# EAGLE board GPSClock (EAGLE 6.5.0)
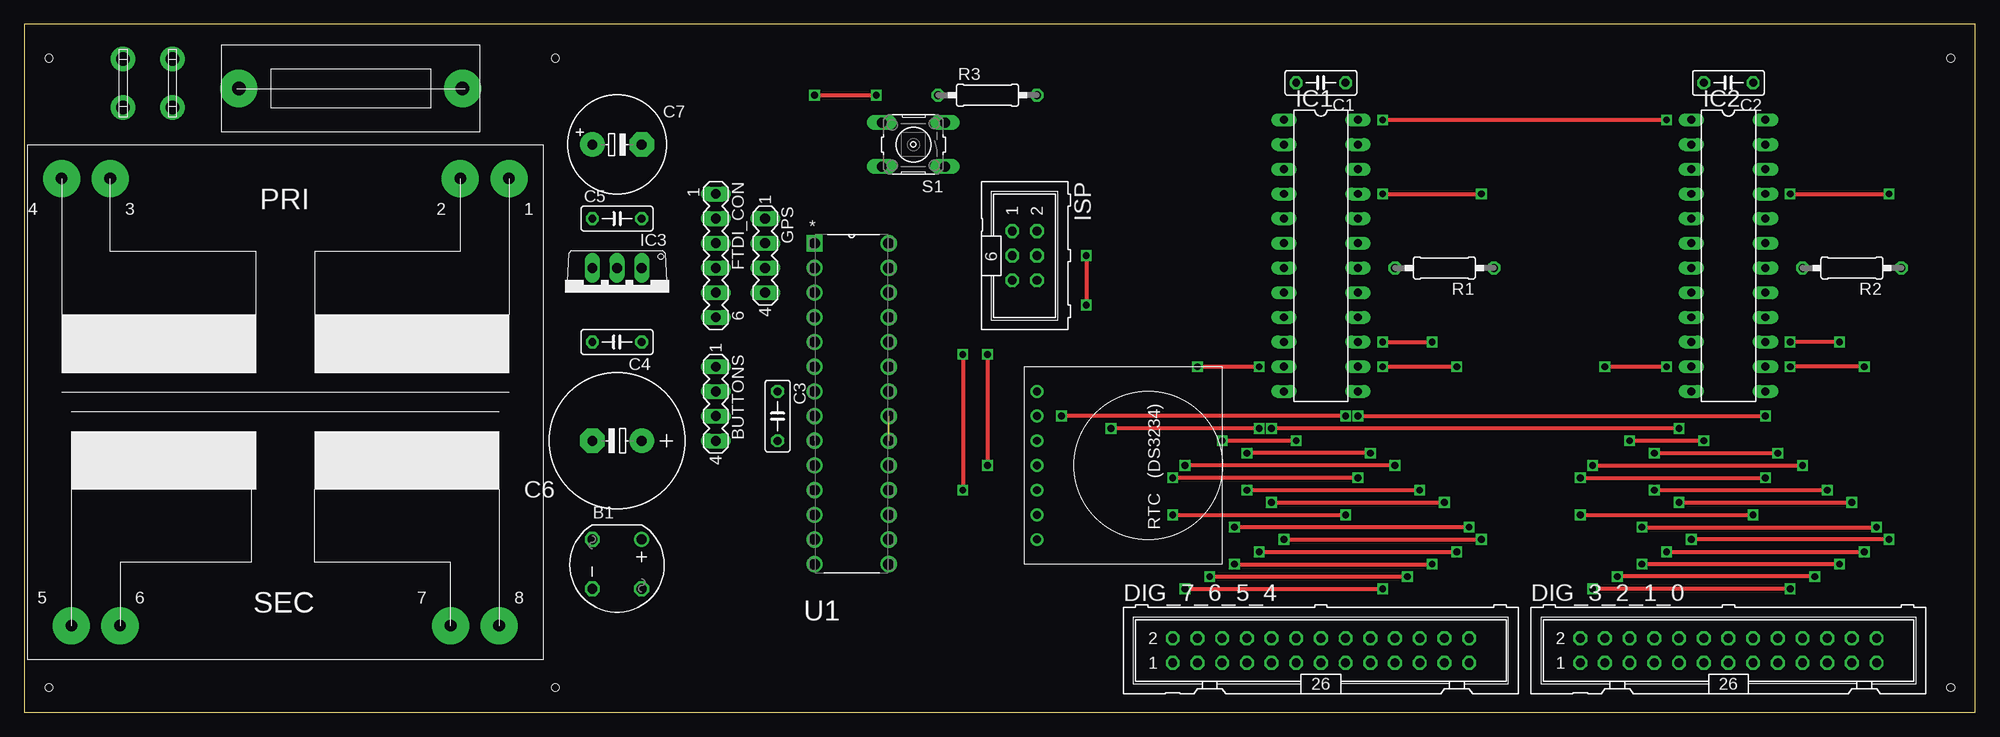
[diagram p0: board, top side]
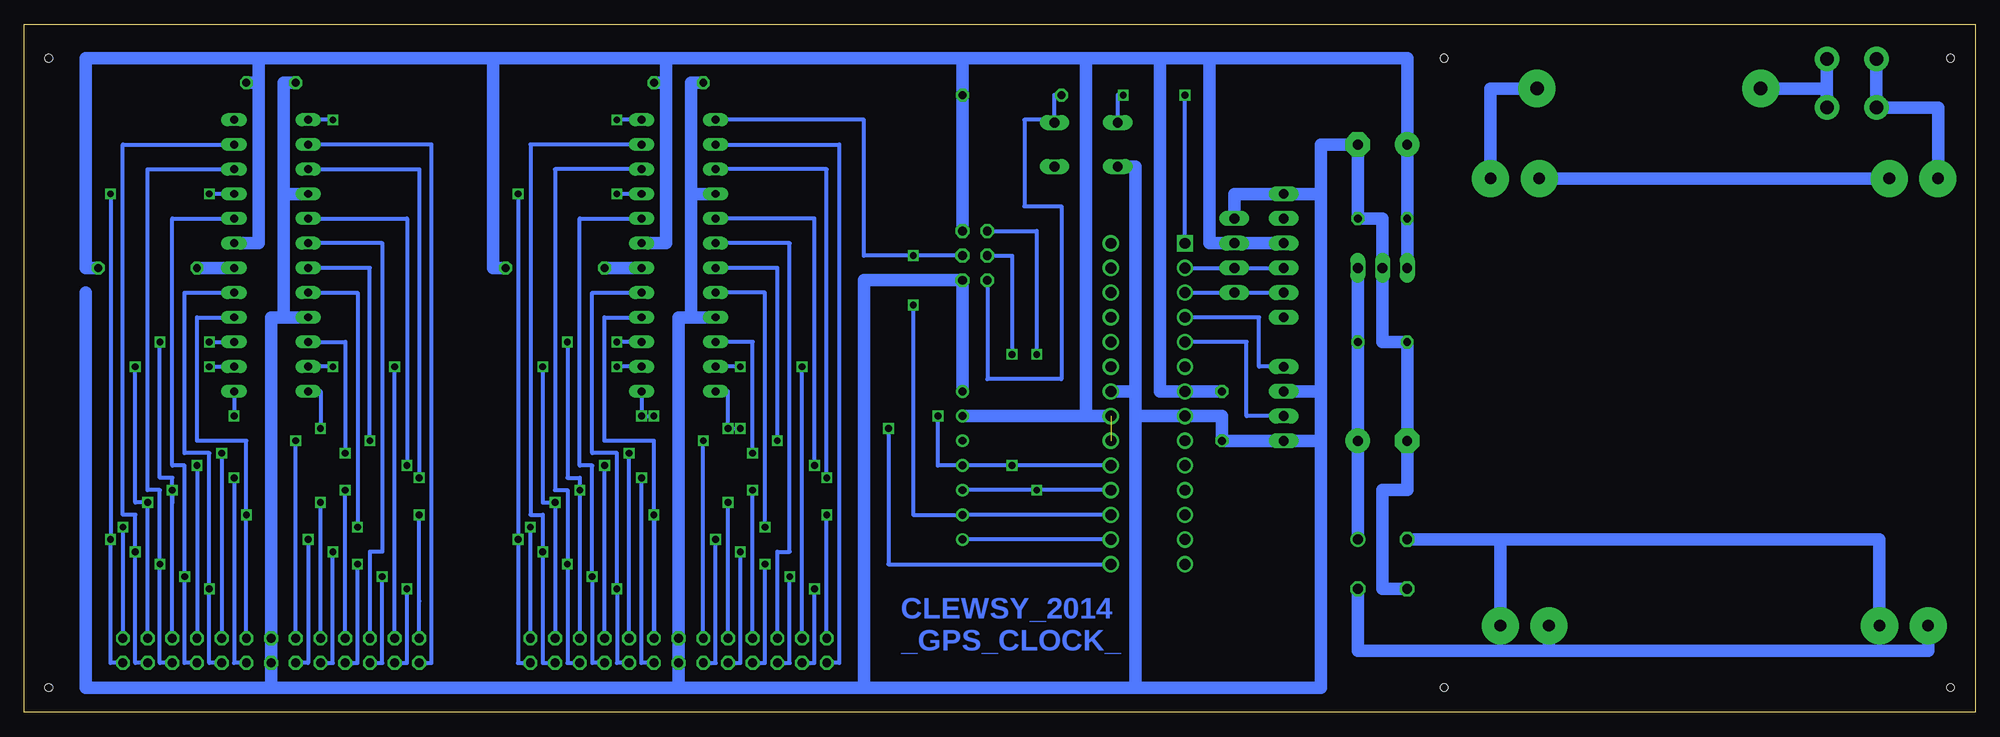
[diagram p1: board, bottom side, seen from below]

Size 200.64 x 70.79 mm. Coordinates in mm from the lower left corner, seen from the top.
Outline: 0,0 200.64,0 200.64,70.79 0,70.79 0,0
Copper layers (1*16): Top 0.035mm / dielectric 1.5mm / Bottom 0.035mm
Design rules "default": minimum track width 10mil, minimum drill 24mil, track to track 8mil, track to pad 8mil, pad to pad 8mil, via to via 8mil, smd to smd 8mil, copper to edge 40mil, drill to drill 8mil, minimum pad ring 10mil, minimum via ring 8mil, stop-mask expansion 4mil, vias tented up to drill 0mil, thermal gap 10mil
Holes 0.8 mm at 198.12,2.54 54.61,2.54 54.61,67.31 198.12,67.31 2.54,67.31 2.54,2.54

## Footprints (pad centres in the part's own frame; a part is rotated, then mirrored left to right if it is on the bottom)
RB1A = drill 1.016: + -2.54,2.54 | drill 1.016 octagon: - 2.54,-2.54; AC1 2.54,2.54; AC2 -2.54,-2.54
MA04-1 = drill 1.016 long: 1 -3.81,0; 2 -1.27,0; 3 1.27,0; 4 3.81,0
C050-025X075 = drill 0.813 octagon: 1 -2.54,0; 2 2.54,0
E5-13 = drill 1.016 pad 2.54: + -2.54,0 | drill 1.016 pad 2.54 octagon: - 2.54,0
E5-10,5 = drill 1.016 pad 2.54: + -2.54,0 | drill 1.016 pad 2.54 octagon: - 2.54,0
ML26 = drill 0.914 octagon: 1 -15.24,-1.27; 2 -15.24,1.27; 3 -12.7,-1.27; 4 -12.7,1.27; 5 -10.16,-1.27; 6 -10.16,1.27; 7 -7.62,-1.27; 8 -7.62,1.27; 9 -5.08,-1.27; 10 -5.08,1.27; 11 -2.54,-1.27; 12 -2.54,1.27; 13 0,-1.27; 14 0,1.27; 15 2.54,-1.27; 16 2.54,1.27; 17 5.08,-1.27; 18 5.08,1.27; 19 7.62,-1.27; 20 7.62,1.27; 21 10.16,-1.27; 22 10.16,1.27; 23 12.7,-1.27; 24 12.7,1.27; 25 15.24,-1.27; 26 15.24,1.27
MA06-1 = drill 1.016 long: 1 -6.35,0; 2 -3.81,0; 3 -1.27,0; 4 1.27,0; 5 3.81,0; 6 6.35,0
DIL24-3 = drill 0.813 long: 1 -13.97,-3.81; 2 -11.43,-3.81; 3 -8.89,-3.81; 4 -6.35,-3.81; 5 -3.81,-3.81; 6 -1.27,-3.81; 7 1.27,-3.81; 8 3.81,-3.81; 9 6.35,-3.81; 10 8.89,-3.81; 11 11.43,-3.81; 12 13.97,-3.81; 13 13.97,3.81; 14 11.43,3.81; 15 8.89,3.81; 16 6.35,3.81; 17 3.81,3.81; 18 1.27,3.81; 19 -1.27,3.81; 20 -3.81,3.81; 21 -6.35,3.81; 22 -8.89,3.81; 23 -11.43,3.81; 24 -13.97,3.81
TO220V = drill 1.016 long: 1 -2.54,-2.54; 2 0,-2.54; 3 2.54,-2.54
ML6 = drill 0.914 octagon: 1 -2.54,-1.27; 2 -2.54,1.27; 3 0,-1.27; 4 0,1.27; 5 2.54,-1.27; 6 2.54,1.27
0207/10 = drill 0.813 octagon: 1 -5.08,0; 2 5.08,0
B3F-10XX = drill 1.016 long: 1 -3.251,2.261; 2 3.251,2.261; 3 -3.251,-2.261; 4 3.251,-2.261
DIP254P762X457-28 = drill 1.118 square: 1 -7.62,33.02 | drill 1.118: 2 -7.62,30.48; 3 -7.62,27.94; 4 -7.62,25.4; 5 -7.62,22.86; 6 -7.62,20.32; 7 -7.62,17.78; 8 -7.62,15.24; 9 -7.62,12.7; 10 -7.62,10.16; 11 -7.62,7.62; 12 -7.62,5.08; 13 -7.62,2.54; 14 -7.62,0; 15 0,0; 16 0,2.54; 17 0,5.08; 18 0,7.62; 19 0,10.16; 20 0,12.7; 21 0,15.24; 22 0,17.78; 23 0,20.32; 24 0,22.86; 25 0,25.4; 26 0,27.94; 27 0,30.48; 28 0,33.02
TRAFO_M4312 = drill 1.2 pad 3.81: P1 3.5,3.5; P2 8.5,3.5; P3 44.5,3.5; P4 49.5,3.5; P5 48.5,49.5; P6 43.5,49.5; P7 9.5,49.5; P8 4.5,49.5
SPADE_PCB = drill 1.4 pad 2.54: P$1 0,0; P$2 5,0
FUSE_HOLDER = drill 1.4 pad 3.81: P$1 1.75,4.5; P$2 24.75,4.5
RTC = drill 0.8: P1 2.54,1.27; P2 5.08,1.27; P3 7.62,1.27; P4 10.16,1.27; P5 12.7,1.27; P6 15.24,1.27; P7 17.78,1.27

## Placement (x,y rotation side)
B1  [RB1A]  60.96,15.24 270 top
BUTTONS  [MA04-1]  71.12,31.75 270 top
C1  [C050-025X075]  133.35,64.77 180 top
C2  [C050-025X075]  175.26,64.77 180 top
C3  [C050-025X075]  77.47,30.48 270 top
C4  [C050-025X075]  60.96,38.1 180 top
C5  [C050-025X075]  60.96,50.8 0 top
C6  [E5-13]  60.96,27.94 180 top
C7  [E5-10,5]  60.96,58.42 0 top
DIG_3_2_1_0  [ML26]  175.26,6.35 0 top
DIG_7_6_5_4  [ML26]  133.35,6.35 0 top
FTDI_CON  [MA06-1]  71.12,46.99 270 top
GPS  [MA04-1]  76.2,46.99 270 top
IC1  MAX7219CNG  [DIL24-3]  133.35,46.99 270 top
IC2  MAX7219CNG  [DIL24-3]  175.26,46.99 270 top
IC3  7805TV  [TO220V]  60.96,43.18 180 top
ISP  [ML6]  102.87,46.99 270 top
R1  [0207/10]  146.05,45.72 180 top
R2  [0207/10]  187.96,45.72 180 top
R3  [0207/10]  99.06,63.5 0 top
S1  [B3F-10XX]  91.44,58.42 180 top
U1  ATMEGA328P-PU  [DIP254P762X457-28]  88.9,15.24 0 top
U$1  TRAFO_M4312  [TRAFO_M4312]  53.34,58.42 180 top
U$2  SPADE_PCB  [SPADE_PCB]  10.16,62.23 90 top
U$3  SPADE_PCB  [SPADE_PCB]  15.24,62.23 90 top
U$4  FUSE_HOLDER  [FUSE_HOLDER]  20.32,59.69 0 top
U$5  RTC  [RTC]  102.87,35.56 270 top

## Library data of the parts
B1 = rectifier
BUTTONS FTDI_CON GPS = con-lstb; OC_FARNELL: unknown; OC_NEWARK: unknown
C1-C7 R1-R3 = rcl
DIG_3_2_1_0 DIG_7_6_5_4 ISP = con-harting-ml; OC_FARNELL: unknown; OC_NEWARK: unknown
IC1 IC2 = maxim; MF: MAXIM; MPN: MAX7219CNG; OC_FARNELL: 1523914; OC_NEWARK: 34C4018
IC3 = linear
S1 = switch-omron; MPN: B3F-1000; OC_FARNELL: 176432; OC_NEWARK: 36M3542
U1 = Atmel_By_element14_Batch_1-00; MPN: ATMEGA328P-PU; OC_FARNELL: 1715487; OC_NEWARK: 15R0268; PACKAGE: PDIP-28; SUPPLIER: Atmel
U$1 = Trafo_M4312
U$2 U$3 = Spade_PCB
U$4 = FUSE_HOLDER
U$5 = RTC

## Nets
GND: B1.- BUTTONS.2 BUTTONS.4 C1.2 C2.2 C3.2 C4.2 C5.2 C6.- C7.- DIG_3_2_1_0.13 DIG_3_2_1_0.14 DIG_7_6_5_4.13 DIG_7_6_5_4.14 FTDI_CON.1 GPS.1 IC1.4 IC1.9 IC2.4 IC2.9 IC3.2 ISP.6 S1.2 U1.8 U1.22 U$5.P1
N$1: FTDI_CON.4 GPS.3 U1.2
N$2: FTDI_CON.5 GPS.4 U1.3
N$3: IC1.13 IC2.13 ISP.3 U1.19 U$5.P4
N$4: ISP.1 U1.18 U$5.P5
N$5: IC1.1 ISP.4 U1.17 U$5.P6
N$6: U1.16 U$5.P7
N$7: IC1.12 IC2.12 U1.15
N$8: B1.AC1 U$1.P5 U$1.P7
N$9: IC1.18 R1.2
N$10: IC2.18 R2.2
N$11: IC1.24 IC2.1
N$12: DIG_3_2_1_0.1 IC2.2
N$13: DIG_3_2_1_0.3 DIG_3_2_1_0.17 IC2.17
N$14: DIG_3_2_1_0.5 DIG_3_2_1_0.19 IC2.20
N$15: DIG_3_2_1_0.7 DIG_3_2_1_0.21 IC2.22
N$16: DIG_3_2_1_0.9 DIG_3_2_1_0.23 IC2.23
N$17: DIG_3_2_1_0.11 DIG_3_2_1_0.25 IC2.21
N$18: DIG_3_2_1_0.15 IC2.3
N$19: DIG_3_2_1_0.2 DIG_3_2_1_0.16 IC2.16
N$20: DIG_3_2_1_0.4 IC2.11
N$21: DIG_3_2_1_0.6 IC2.6
N$22: DIG_3_2_1_0.8 DIG_3_2_1_0.22 IC2.15
N$23: DIG_3_2_1_0.10 DIG_3_2_1_0.24 IC2.14
N$24: DIG_3_2_1_0.12 IC2.7
N$25: DIG_3_2_1_0.18 IC2.10
N$26: DIG_3_2_1_0.20 IC2.5
N$27: DIG_3_2_1_0.26 IC2.8
N$28: DIG_7_6_5_4.1 IC1.2
N$29: DIG_7_6_5_4.3 DIG_7_6_5_4.17 IC1.17
N$30: DIG_7_6_5_4.5 DIG_7_6_5_4.19 IC1.20
N$31: DIG_7_6_5_4.7 DIG_7_6_5_4.21 IC1.22
N$32: DIG_7_6_5_4.9 DIG_7_6_5_4.23 IC1.23
N$33: DIG_7_6_5_4.11 DIG_7_6_5_4.25 IC1.21
N$34: DIG_7_6_5_4.15 IC1.3
N$35: DIG_7_6_5_4.2 DIG_7_6_5_4.16 IC1.16
N$36: DIG_7_6_5_4.4 IC1.11
N$37: DIG_7_6_5_4.6 IC1.6
N$38: DIG_7_6_5_4.8 DIG_7_6_5_4.22 IC1.15
N$39: DIG_7_6_5_4.10 DIG_7_6_5_4.24 IC1.14
N$40: DIG_7_6_5_4.12 IC1.7
N$41: DIG_7_6_5_4.18 IC1.10
N$42: DIG_7_6_5_4.20 IC1.5
N$43: DIG_7_6_5_4.26 IC1.8
N$44: U$3.P$1 U$3.P$2 U$4.P$1
N$45: ISP.5 R3.1 S1.3
N$46: BUTTONS.1 U1.4
N$47: BUTTONS.3 U1.5
N$48: S1.4 U1.1
N$49: U$1.P2 U$1.P3
N$50: B1.+ C4.1 C6.+ IC3.1
N$51: U$1.P1 U$4.P$2
N$52: U$1.P4 U$2.P$1 U$2.P$2
TRAN: B1.AC2 U$1.P6 U$1.P8
VCC: C1.1 C2.1 C3.1 C5.1 C7.+ FTDI_CON.3 GPS.2 IC1.19 IC2.19 IC3.3 ISP.2 R1.1 R2.1 R3.2 U1.7 U1.20 U1.21 U$5.P2

## Tracks (layer width: path | path; a pad name or v marks a point on that pad's centre or on a via)
GND
  Bottom 1.27: 132.08,53.34 132.08,40.64 IC1.9 133.35,40.64 DIG_7_6_5_4.14 DIG_7_6_5_4.13 133.35,2.54 | IC1.4 132.08,53.34 | 132.08,53.34 132.08,64.77 C1.2 | IC2.4 173.99,53.34 | 173.99,53.34 173.99,40.64 | 173.99,40.64 175.26,40.64 DIG_3_2_1_0.14 DIG_3_2_1_0.13 175.26,2.54 | 175.26,2.54 133.35,2.54 | 173.99,53.34 173.99,64.77 C2.2 | IC2.9 173.99,40.64 | U1.22 86.36,33.02 | 86.36,33.02 86.36,30.48 | 86.36,30.48 86.36,2.54 | 86.36,2.54 114.3,2.54 | 86.36,30.48 U1.8 77.47,30.48 C3.2 BUTTONS.4 67.31,27.94 | U$5.P1 ISP.6 114.3,44.45 114.3,2.54 | 114.3,2.54 133.35,2.54 | S1.2 86.36,56.16 86.36,33.02 | 67.31,53.34 FTDI_CON.1 76.2,53.34 GPS.1 | 67.31,53.34 67.31,33.02 | 67.31,33.02 67.31,27.94 | BUTTONS.2 67.31,33.02 | 86.36,2.54 67.31,2.54 67.31,27.94 | B1.- 60.96,12.7 60.96,22.86 58.42,22.86 C6.- C4.2 60.96,38.1 IC3.2 60.96,50.8 C5.2 C7.- 67.31,58.42 67.31,53.34 | 175.26,2.54 194.31,2.54 194.31,43.18
N$1
  Bottom 0.406: U1.2 GPS.3 FTDI_CON.4
N$2
  Bottom 0.406: U1.3 GPS.4 FTDI_CON.5
N$3  (via drill 0.7)
  Top 0.406: v137.16,30.48 v179.07,30.48 | v135.89,30.48 v106.68,30.48 | v99.06,36.83 v99.06,25.4
  Bottom 0.406: IC2.13 v179.07,30.48 | IC1.13 v137.16,30.48 v135.89,30.48 | U1.19 v99.06,25.4 U$5.P4 106.68,25.4 v106.68,30.48 | ISP.3 99.06,46.99 v99.06,36.83
N$4  (via drill 0.7)
  Top 0.406: v96.52,36.83 v96.52,22.86
  Bottom 0.406: U1.18 v96.52,22.86 U$5.P5 | ISP.1 96.52,49.53 v96.52,36.83
N$5  (via drill 0.7)
  Top 0.406: v109.22,46.99 v109.22,41.91
  Bottom 0.406: U1.17 U$5.P6 109.22,20.32 v109.22,41.91 | IC1.1 114.3,60.96 114.3,46.99 v109.22,46.99 ISP.4
N$6
  Bottom 0.406: U1.16 U$5.P7
N$7  (via drill 0.7)
  Top 0.406: v127,29.21 v111.76,29.21 | v170.18,29.21 v128.27,29.21
  Bottom 0.406: IC2.12 170.18,33.02 v170.18,29.21 | IC1.12 128.27,33.02 v128.27,29.21 v127,29.21 | v111.76,29.21 111.76,15.24 U1.15
N$8
  Bottom 1.27: B1.AC1 63.5,6.35 43.84,6.35 | 43.84,6.35 U$1.P7 | U$1.P5 4.84,6.35 43.84,6.35
N$9
  Bottom 1.27: R1.2 IC1.18
N$10
  Bottom 1.27: IC2.18 R2.2
N$11  (via drill 0.7)
  Top 0.406: v139.7,60.96 v168.91,60.96
  Bottom 0.406: IC1.24 v139.7,60.96 | v168.91,60.96 IC2.1
N$12
  Bottom 0.406: DIG_3_2_1_0.1 158.75,5.08 158.75,58.42 IC2.2
N$13  (via drill 0.7)
  Top 0.406: v181.61,12.7 v161.29,12.7
  Bottom 0.406: DIG_3_2_1_0.3 161.29,5.08 v161.29,12.7 | DIG_3_2_1_0.17 181.61,5.08 v181.61,12.7 181.61,26.67 184.15,26.67 184.15,43.18 IC2.17
N$14  (via drill 0.7)
  Top 0.406: v184.15,13.97 v163.83,13.97
  Bottom 0.406: DIG_3_2_1_0.5 163.83,5.08 v163.83,13.97 | DIG_3_2_1_0.19 184.15,5.08 v184.15,13.97 184.15,25.4 185.42,25.4 185.42,50.8 IC2.20
N$15  (via drill 0.7)
  Top 0.406: v186.69,15.24 v166.37,15.24
  Bottom 0.406: DIG_3_2_1_0.7 166.37,5.08 v166.37,15.24 | DIG_3_2_1_0.21 186.69,5.08 v186.69,15.24 186.69,22.86 187.96,22.86 187.96,55.88 IC2.22
N$16  (via drill 0.7)
  Top 0.406: v168.91,16.51 v189.23,16.51
  Bottom 0.406: DIG_3_2_1_0.23 189.23,5.08 v189.23,16.51 189.23,20.32 190.5,20.32 190.5,58.42 IC2.23 | DIG_3_2_1_0.9 168.91,5.08 v168.91,16.51
N$17  (via drill 0.7)
  Top 0.406: v191.77,17.78 v171.45,17.78 | v181.61,53.34 v191.77,53.34
  Bottom 0.406: DIG_3_2_1_0.25 191.77,5.08 v191.77,17.78 v191.77,53.34 | v171.45,17.78 171.45,5.08 DIG_3_2_1_0.11 | IC2.21 v181.61,53.34
N$18  (via drill 0.7)
  Top 0.406: v160.02,24.13 v179.07,24.13
  Bottom 0.406: DIG_3_2_1_0.15 179.07,5.08 v179.07,24.13 | IC2.3 160.02,55.88 v160.02,24.13
N$19  (via drill 0.7)
  Top 0.406: v160.02,20.32 v177.8,20.32
  Bottom 0.406: 160.02,11.43 DIG_3_2_1_0.2 v160.02,20.32 | DIG_3_2_1_0.16 v177.8,20.32 177.8,27.94 182.88,27.94 182.88,40.64 IC2.16
N$20  (via drill 0.7)
  Top 0.406: v162.56,35.56 v168.91,35.56
  Bottom 0.406: DIG_3_2_1_0.4 v162.56,35.56 | v168.91,35.56 IC2.11
N$21
  Bottom 0.406: IC2.6 163.83,48.26 163.83,16.51 165.1,16.51 DIG_3_2_1_0.6
N$22  (via drill 0.7)
  Top 0.406: v186.69,38.1 v181.61,38.1 | v167.64,22.86 v185.42,22.86
  Bottom 0.406: DIG_3_2_1_0.22 v185.42,22.86 | v185.42,22.86 185.42,24.13 186.69,24.13 v186.69,38.1 | v181.61,38.1 IC2.15 | DIG_3_2_1_0.8 v167.64,22.86 | v185.42,22.86 185.42,21.59
N$23  (via drill 0.7)
  Top 0.406: v189.23,35.56 v181.61,35.56 | v170.18,21.59 v187.96,21.59
  Bottom 0.406: DIG_3_2_1_0.24 v187.96,21.59 189.23,21.59 v189.23,35.56 | v181.61,35.56 IC2.14 | DIG_3_2_1_0.10 v170.18,21.59
N$24  (via drill 0.7)
  Top 0.406: v172.72,27.94 v165.1,27.94
  Bottom 0.406: DIG_3_2_1_0.12 v172.72,27.94 | IC2.7 165.1,45.72 v165.1,27.94
N$25  (via drill 0.7)
  Top 0.406: v167.64,26.67 v180.34,26.67
  Bottom 0.406: IC2.10 167.64,38.1 v167.64,26.67 | v180.34,26.67 DIG_3_2_1_0.18
N$26  (via drill 0.7)
  Top 0.406: v161.29,25.4 v182.88,25.4
  Bottom 0.406: IC2.5 161.29,50.8 v161.29,25.4 | v182.88,25.4 DIG_3_2_1_0.20
N$27  (via drill 0.7)
  Top 0.406: v166.37,19.05 v190.5,19.05
  Bottom 0.406: IC2.8 166.37,43.18 v166.37,19.05 | v190.5,19.05 DIG_3_2_1_0.26
N$28
  Bottom 0.406: IC1.2 116.84,58.42 116.84,5.08 DIG_7_6_5_4.1
N$29  (via drill 0.7)
  Top 0.406: v119.38,12.7 v139.7,12.7
  Bottom 0.406: DIG_7_6_5_4.3 119.38,5.08 v119.38,12.7 | DIG_7_6_5_4.17 139.7,5.08 v139.7,12.7 139.7,26.67 142.24,26.67 142.24,43.18 IC1.17
N$30  (via drill 0.7)
  Top 0.406: v121.92,13.97 v142.24,13.97
  Bottom 0.406: DIG_7_6_5_4.5 121.92,5.08 v121.92,13.97 | DIG_7_6_5_4.19 142.24,5.08 v142.24,13.97 142.24,25.4 143.51,25.4 143.51,50.8 IC1.20
N$31  (via drill 0.7)
  Top 0.406: v124.46,15.24 v144.78,15.24
  Bottom 0.406: DIG_7_6_5_4.7 124.46,5.08 v124.46,15.24 | DIG_7_6_5_4.21 144.78,5.08 v144.78,15.24 144.78,22.86 146.05,22.86 146.05,55.88 IC1.22
N$32  (via drill 0.7)
  Top 0.406: v127,16.51 v147.32,16.51
  Bottom 0.406: DIG_7_6_5_4.9 127,5.08 v127,16.51 | DIG_7_6_5_4.23 147.32,5.08 v147.32,16.51 147.32,20.32 148.59,20.32 148.59,58.42 IC1.23
N$33  (via drill 0.7)
  Top 0.406: v129.54,17.78 v149.86,17.78 | v139.7,53.34 v149.86,53.34
  Bottom 0.406: DIG_7_6_5_4.11 129.54,5.08 v129.54,17.78 | DIG_7_6_5_4.25 149.86,5.08 v149.86,17.78 v149.86,53.34 | IC1.21 v139.7,53.34
N$34  (via drill 0.7)
  Top 0.406: v137.16,24.13 v118.11,24.13
  Bottom 0.406: DIG_7_6_5_4.15 137.16,5.08 v137.16,24.13 | v118.11,24.13 118.11,55.88 IC1.3
N$35  (via drill 0.7)
  Top 0.406: v118.11,20.32 v135.89,20.32
  Bottom 0.406: DIG_7_6_5_4.2 v118.11,20.32 | v135.89,20.32 DIG_7_6_5_4.16 135.89,27.94 140.97,27.94 140.97,40.64 IC1.16
N$36  (via drill 0.7)
  Top 0.406: v120.65,35.56 v127,35.56
  Bottom 0.406: DIG_7_6_5_4.4 v120.65,35.56 | v127,35.56 IC1.11
N$37
  Bottom 0.406: DIG_7_6_5_4.6 123.19,16.51 121.92,16.51 121.92,48.26 IC1.6
N$38  (via drill 0.7)
  Top 0.406: v125.73,22.86 v143.51,22.86 | v139.7,38.1 v144.78,38.1
  Bottom 0.406: DIG_7_6_5_4.8 v125.73,22.86 | DIG_7_6_5_4.22 v143.51,22.86 143.51,24.13 144.78,24.13 v144.78,38.1 | IC1.15 v139.7,38.1
N$39  (via drill 0.7)
  Top 0.406: v128.27,21.59 v146.05,21.59 | v139.7,35.56 v147.32,35.56
  Bottom 0.406: DIG_7_6_5_4.10 v128.27,21.59 | DIG_7_6_5_4.24 v146.05,21.59 147.32,21.59 v147.32,35.56 | IC1.14 v139.7,35.56
N$40  (via drill 0.7)
  Top 0.406: v130.81,27.94 v123.19,27.94
  Bottom 0.406: DIG_7_6_5_4.12 v130.81,27.94 | v123.19,27.94 123.19,45.72 IC1.7
N$41  (via drill 0.7)
  Top 0.406: v138.43,26.67 v125.73,26.67
  Bottom 0.406: DIG_7_6_5_4.18 v138.43,26.67 | v125.73,26.67 125.73,38.1 IC1.10
N$42  (via drill 0.7)
  Top 0.406: v140.97,25.4 v119.38,25.4
  Bottom 0.406: DIG_7_6_5_4.20 v140.97,25.4 | v119.38,25.4 119.38,50.8 IC1.5
N$43  (via drill 0.7)
  Top 0.406: v148.59,19.05 v124.46,19.05
  Bottom 0.406: DIG_7_6_5_4.26 v148.59,19.05 | v124.46,19.05 124.46,43.18 IC1.8
N$44
  Bottom 1.27: U$3.P$2 15.24,64.19 | U$4.P$1 15.24,64.19 | 15.24,64.19 U$3.P$1
N$45
  Bottom 0.406: ISP.5 101.6,34.29 93.98,34.29 93.98,52.07 97.79,52.07 97.79,60.96 94.69,60.96 S1.3 94.69,63.5 R3.1
N$46
  Bottom 0.406: BUTTONS.1 73.66,35.56 73.66,40.64 U1.4
N$47
  Bottom 0.406: BUTTONS.3 74.93,30.48 74.93,38.1 U1.5
N$48  (via drill 0.7)
  Top 0.406: v81.28,63.5 v87.63,63.5
  Bottom 0.406: U1.1 v81.28,63.5 | v87.63,63.5 88.19,63.5 S1.4
N$49
  Bottom 1.27: U$1.P3 U$1.P2
N$50
  Bottom 1.27: B1.+ C6.+ C4.1 IC3.1
N$51
  Bottom 1.27: U$4.P$2 49.84,64.19 U$1.P1
N$52
  Bottom 1.27: U$1.P4 3.81,54.92 3.81,62.23 U$2.P$1 U$2.P$2
TRAN
  Bottom 1.27: 48.84,17.78 B1.AC2 | U$1.P6 9.84,17.78 48.84,17.78 | 48.84,17.78 U$1.P8
VCC  (1 unrouted)
  Bottom 0.406: U1.21 91.44,30.48
  Bottom 1.27: R2.1 194.31,45.72 194.31,67.31 176.53,67.31 | IC1.19 134.62,48.26 134.62,64.77 | 134.62,64.77 134.62,67.31 | 134.62,67.31 152.4,67.31 | 152.4,67.31 176.53,67.31 | IC2.19 176.53,48.26 176.53,64.77 | 176.53,64.77 176.53,67.31 | R1.1 152.4,45.72 152.4,67.31 | ISP.2 R3.2 104.14,67.31 | 104.14,67.31 134.62,67.31 | U1.21 U$5.P2 | 91.44,30.48 91.44,67.31 | 83.82,67.31 83.82,33.02 U1.7 C3.1 | 104.14,67.31 91.44,67.31 | 91.44,67.31 83.82,67.31 | 78.74,67.31 78.74,48.26 GPS.2 FTDI_CON.3 | 78.74,67.31 83.82,67.31 | C1.1 134.62,64.77 | C2.1 176.53,64.77 | IC3.3 C5.1 C7.+ 58.42,67.31 78.74,67.31

## Text on the board
Bottom: CLEWSY_2014 / _GPS_CLOCK_